# Altium PCB gps-tag-lora-addon.PcbDoc (part 1 of 3)
Units mm, origin at the board's own origin, x right, y up, seen from the top; angles counter-clockwise.
Board outline 60 x 35 mm, 2 copper layers (Top Layer, Bottom Layer); 76 components, 64 nets, 296 pads, 200 vias.
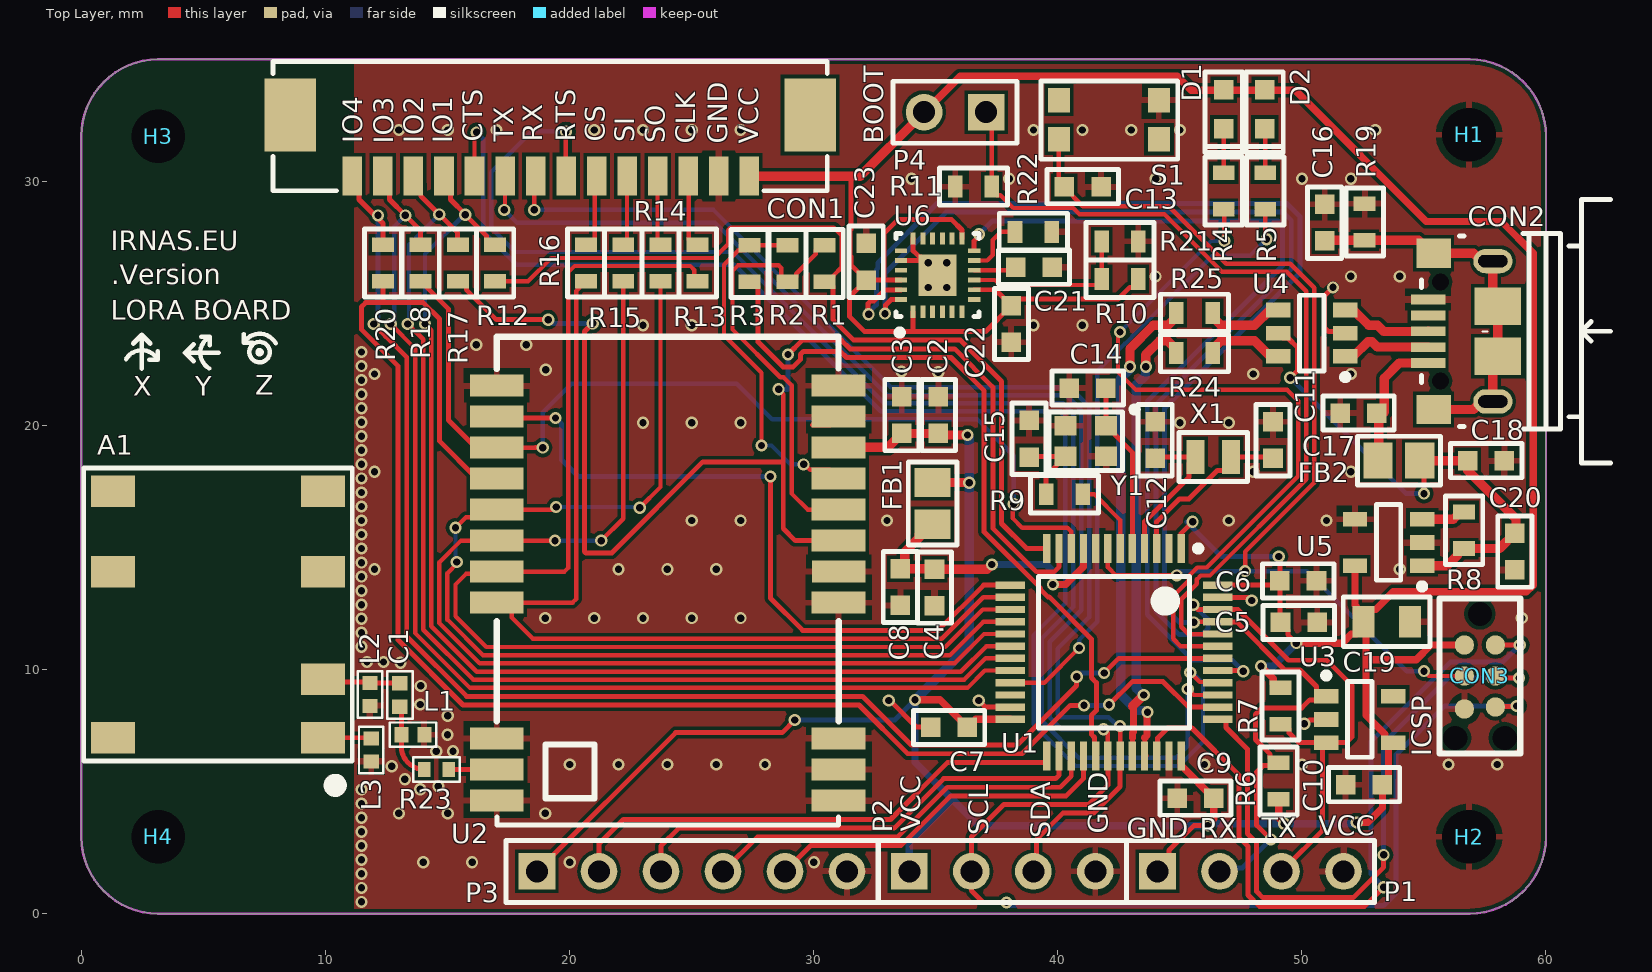
[diagram p0: Top Layer view]
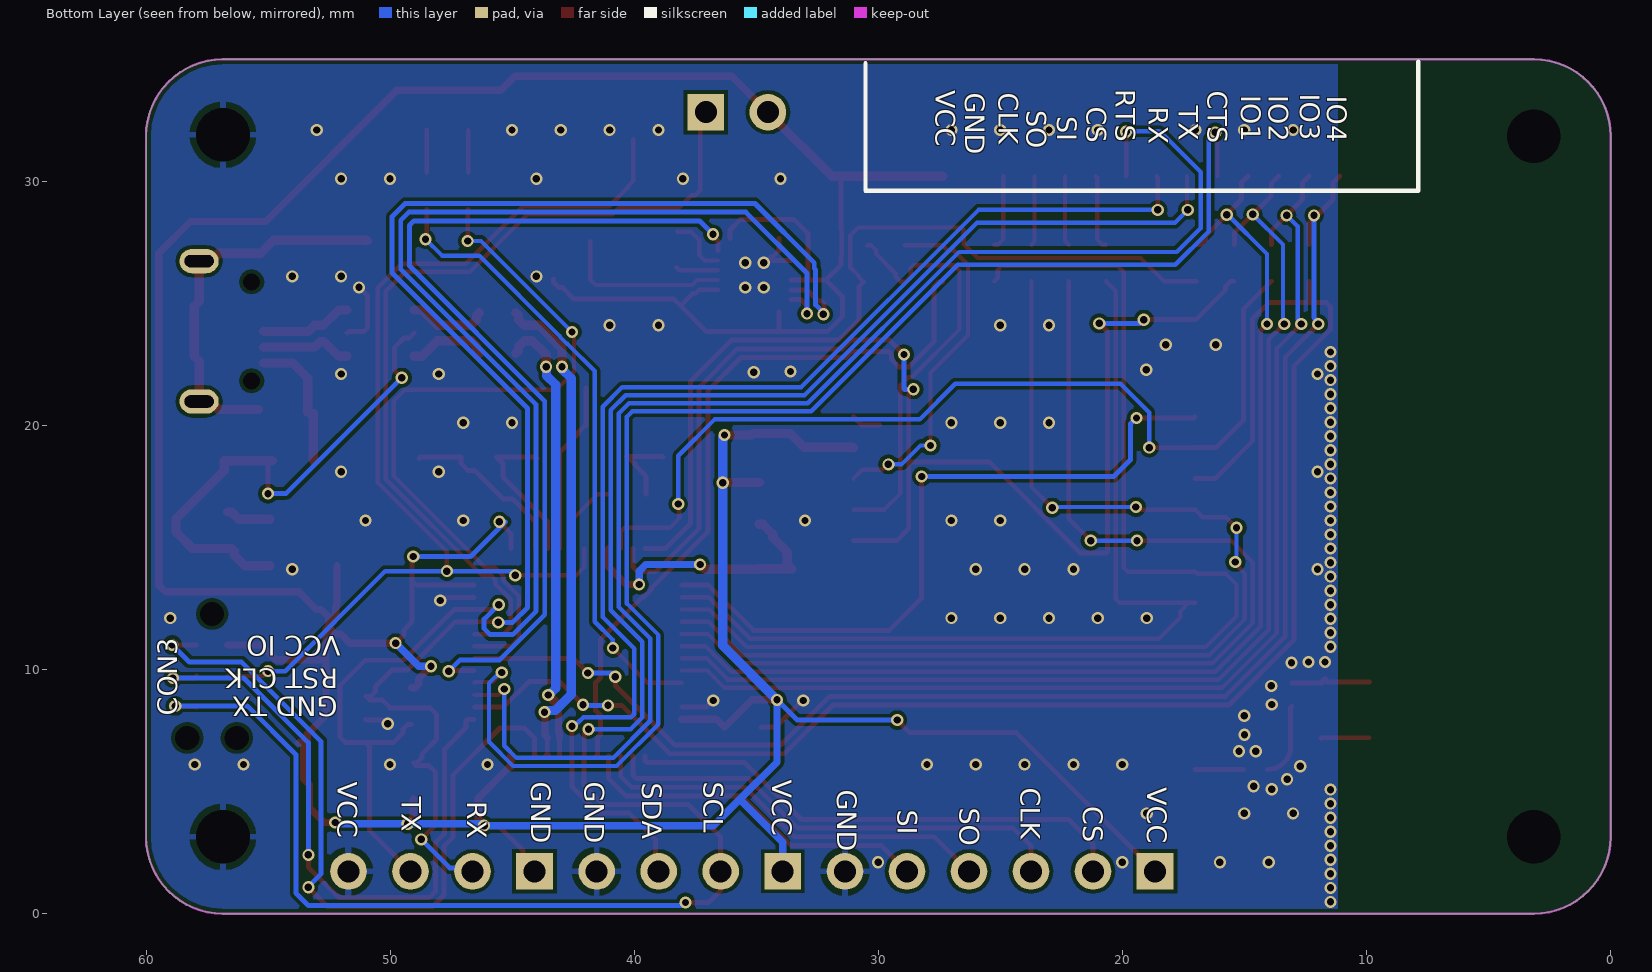
[diagram p1: Bottom Layer view, seen from below]

## Layer stack, top to bottom
Top Solder: solder mask 0.0102, Solder Resist, Dk 3.5
Top Layer: signal copper 0.0356
Dielectric 1: dielectric 0.32, FR-4, Dk 4.8
Bottom Layer: signal copper 0.0356
Bottom Solder: solder mask 0.0102, Solder Resist, Dk 3.5

## Board outline
0,3.116 0,31.866 cw(c3.15,31.841) 3.125,34.991 56.875,34.991 cw(c56.85,31.841) 60,31.866 60,3.116 cw(c56.85,3.141) 56.875,-0.009 3.125,-0.009 cw(c3.15,3.141)

## Design rules (kind name [scope] priority, off if disabled: settings)
Clearance [All] p1: gap=0.152 ignorepadtopadclearanceinfootprint=FALSE
ComponentClearance [All] p1: gap=0 collisioncheckmode=3 verticalgap=0 showdistances=FALSE
DiffPairsRouting [All] p1: maxlimit=0.254 minlimit=0.254 mostfreqgap=0.254 toplayer_minwidth=0.152 toplayer_maxwidth=0.381 toplayer_prefwidth=0.381 bottomlayer_minwidth=0.152 bottomlayer_maxwidth=0.381 bottomlayer_prefwidth=0.381 maxuncoupledlength=12.7
PolygonConnect [All] p1: thpad.connectstyle=Relief thpad.reliefconductorwidth=0.254 thpad.reliefentries=4 thpad.polygonreliefangle="90 Angle" thpad.airgapwidth=0.254 smdpad.connectstyle=Relief smdpad.reliefconductorwidth=0.254 smdpad.reliefentries=4 smdpad.polygonreliefangle="90 Angle" smdpad.airgapwidth=0.254 via.connectstyle=Direct via.reliefconductorwidth=0.254 via.reliefentries=4 via.polygonreliefangle="90 Angle" via.airgapwidth=0.254
RoutingVias [All] p1: holewidth=0.3 width=0.5 viastyle="Through Hole" minholewidth=0.3 minwidth=0.5 maxholewidth=0.711 maxwidth=1.27
SolderMaskExpansion [All] p1: expansion=0.102
Width [All] p1: maxlimit=0.381 minlimit=0.152 preferedwidth=0.178 minimp=50.000000 maximp=50.000000 favimp=50.000000
28 further rules are at their usual default settings.

## Classes and differential pairs
differential pair USB: +USB_P -USB_N
differential pair USB_CON: +USB_CON_P -USB_CON_N
differential pair USB_A: +USB_A_P -USB_A_N

## Components (designator, comment, footprint, x,y, rotation, side; value= is the part's Value field where it differs from the comment)
A1 "SR42I010-R" LORA_PCB_ANTENNA 5.6,12.25 r90 top
C1 "2.2uF" CAP0402 13.05,8.952 r90 top
C2 "100nF" CAP0603 35.113,20.417 r270 top
C3 "1uF" CAP0603 33.613,20.417 r270 top
C4 "1uF" CAP0603 34.95,13.35 r90 top
C5 "1uF" CAP0603 49.875,11.925 r180 top
C6 "100nF" CAP0603 49.85,13.63 r180 top
C7 "100nF" CAP0603 35.55,7.625 r0 top
C8 "100nF" CAP0603 33.55,13.375 r90 top
C9 "100nF" CAP0603 45.643,4.725 r0 top
C10 "100nF" CAP0603 52.55,5.275 r0 top
C11 "20pF" CAP0603 48.818,19.391 r270 top
C12 "20pF" CAP0603 43.992,19.39 r270 top
C13 "100nF" CAP0603 41.025,29.775 r180 top
C14 "20pF" CAP0603 41.225,21.525 r0 top
C15 "20pF" CAP0603 38.825,19.45 r270 top
C16 "330pF" CAP0603 50.937,28.3 r90 top
C17 "100nF" CAP0603 52.325,20.5 r0 top
C18 "100nF" CAP0603 57.55,18.55 r180 top
C19 "2.2uF" CAP0805 53.475,11.95 r180 top
C20 "1uF" CAP0603 58.725,14.825 r90 top
C21 "100nF" CAP0603 39.025,26.475 r180 top
C22 "10nF" CAP0603 38.1,24.15 r90 top
C23 "100nF" CAP0603 32.15,26.7 r270 top
CON1 "53261-1471" 53261-1471 29.856,32.708 r180 top
CON2 "microUSB" microUSB-CHINA 56.6,23.85 r90 top
CON3 "Tag connect" TC2030-IDC-NL 57.294,12.27 r270 top
D1 "LED RED" LED0603 46.8,32.95 r90 top
D2 "LED RED" LED0603 48.475,32.95 r90 top
FB1 "BLM21PG221SN1D" IND0805 34.875,16.8 r90 top
FB2 "BLM21PG221SN1D" IND0805 53.975,18.55 r0 top
H1 "2.2mm" HOLE 56.85,31.9 r0 top locked
H2 "2.2mm" HOLE 56.85,3.141 r0 top locked
H3 "2.2mm" HOLE 3.15,31.841 r0 top
H4 "2.2mm" HOLE 3.15,3.141 r0 top
L1 "33nH" IND0402 13.58,7.325 r180 top
L2 "33nH" IND0402 11.825,8.975 r90 top
L3 "4.3nH" IND0402 11.875,6.7 r90 top
P1 "Header 4" HDR1X4 44.085,1.725 r0 top
P2 "Header 4" HDR1X4 33.92,1.725 r0 top
P3 "Header 6" HDR1X6 18.665,1.725 r0 top
P4 "Header 2" HDR1X2 37.065,32.825 r180 top
R1 "0R" RES0603 30.45,26.625 r90 top
R2 "0R" RES0603 28.925,26.625 r270 top
R3 "0R" RES0603 27.375,26.625 r90 top
R4 "470R" RES0603 46.8,29.6 r270 top
R5 "470R" RES0603 48.5,29.6 r270 top
R6 "4k7" RES0603 49.05,5.425 r270 top
R7 "4k7" RES0603 49.125,8.5 r90 top
R8 "10k" RES0603 56.65,15.7 r270 top
R9 "220R" RES0603 40.275,17.175 r180 top
R10 "0R" RES0603 42.55,26 r180 top
R11 "10k" RES0603 36.55,29.775 r180 top
R12 "0R" RES0603 16.95,26.65 r270 top
R13 "0R" RES0603 25.25,26.65 r270 top
R14 "0R" RES0603 23.725,26.65 r270 top
R15 "0R" RES0603 22.2,26.65 r270 top
R16 "0R" RES0603 20.675,26.65 r270 top
R17 "0R" RES0603 15.425,26.65 r270 top
R18 "0R" RES0603 13.9,26.65 r270 top
R19 "1M" RES0603 52.575,28.325 r270 top
R20 "0R" RES0603 12.356,26.65 r270 top
R21 "0R" RES0603 42.55,27.538 r180 top
R22 "10k" RES0603 39,27.925 r0 top
R23 "0R" RES0402 14.55,5.9 r180 top
R24 "27R" RES0603 45.6,22.955 r180 top
R25 "27R" RES0603 45.6,24.606 r180 top
S1 "KMR221NGLFS" SW 42.175,32.35 r180 top
U1 "STM32L072CZ" TSQFP50P900X900X160-48N 42.304,10.702 r270 top
U2 "E22-900M22S" E22-900M22S 24.025,13.125 r0 top
U3 "24AA02E48T-I/OT" SOT95P280X145-5N 52.375,7.95 r0 top
U4 "USBLC6-2SC6" SOT95P280X145-6N 50.4,23.775 r180 top
U5 "TPS78326DDCT" SOT95P280X145-5N 53.55,15.2 r180 top
U6 "MPU-9250" QFN40P300X300X105_HS-25N 35.075,26.15 r90 top
X1 "32.768KHZ" CRY2X1.2 46.368,18.703 r0 top
Y1 "16MHz" CRY2.5X2 41.15,19.35 r180 top

## Footprints (in the part's own frame and the unit in brackets; to place one, negate y for a bottom-side part, rotate by r counter-clockwise, add the part's x,y. Pads: shape width x height; smd on the part's side, far side on the other; paste and mask are expansions set on the pad)
53261-1471 [mm]
  rect 0.8x1.6 smd: 1(2.5,2.5) 2(3.75,2.5) 3(5,2.5) 4(6.25,2.5) 5(7.5,2.5) 6(8.75,2.5) 7(10,2.5) 8(11.25,2.5) 9(12.5,2.5) 10(13.75,2.5) 11(15,2.5) 12(16.25,2.5) 13(17.5,2.5) 14(18.75,2.5)
  rect 2.1x3 smd: ""(0,0) ""(21.3,0)
  silkscreen extent -0.7,-2.2 22,3.1, body extent -0.67,-2.18 21.97,3.03, height 3.41
CAP0402 [mm] "Chip Capacitor, 2-Leads, Body 1.00x0.50mm, IPC Medium Density"
  rect 0.6x0.64 smd: 1(-0.48,0) 2(0.48,0)
  silkscreen extent -0.97,-0.53 0.97,0.53, body extent -0.55,-0.3 0.55,0.3, height 0.45
CAP0603 [mm]
  rect 0.8x0.8 smd: 1(-0.75,0) 2(0.75,0)
  silkscreen extent -1.46,-0.7 1.46,0.7, body extent -0.8,-0.4 0.8,0.4, height 0.9
CAP0805 [mm]
  rect 0.9x1.3 smd: 1(-0.95,0) 2(0.95,0)
  silkscreen extent -1.78,-1.02 1.78,1.02, body extent -1,-0.6 1,0.6, height 1.5
CRY2.5X2 [mm]
  rect 0.9x0.8 smd paste+0 mask+0: 1(-0.825,-0.625) 2(0.825,-0.625) 3(0.825,0.625) 4(-0.825,0.625)
  silkscreen extent -2.1,-1.4 1.5,1.2, body extent -1.25,-0.99 1.25,0.99, height 0.7
CRY2X1.2 [mm]
  rect 0.75x1.4 smd: 1(-0.725,0) 2(0.725,0)
  silkscreen extent -1.4,-1 1.4,1, body extent -1,-0.6 1,0.6, height 0.6
E22-900M22S [mm]
  rect 2.2x0.9 smd: 1(6.995,-8.5) 2(6.995,-7.23) 3(6.995,-5.96) 4(6.995,-0.39) 5(7.005,0.88) 6(6.995,2.15) 7(6.995,3.42) 8(6.995,4.69) 9(6.995,5.96) 10(6.995,7.23) 11(6.995,8.5) 12(-7.005,8.5) 13(-7.005,7.23) 14(-7.005,5.96) 15(-7.005,4.69) 16(-7.005,3.42) 17(-7.005,2.15) 18(-7.005,0.88) 19(-7.005,-0.39) 20(-7.005,-5.96) 21(-7.005,-7.23) 22(-7.005,-8.5)
  silkscreen extent -7,-9.5 7.01,10.5, body extent -7,-9.5 7,10.4, height 3.87
HDR1X2 [mm] "Connector; Header; 2 Position"
  rect 1.5x1.5 hole 0.9: 1(0,0)
  round 1.5 hole 0.9: 2(2.54,0)
  silkscreen extent -1.27,-1.27 3.81,1.27
HDR1X4 [mm] "Connector; Header; 4 Position"
  rect 1.5x1.5 hole 0.9: 1(0,0)
  round 1.5 hole 0.9: 2(2.54,0) 3(5.08,0) 4(7.62,0)
  silkscreen extent -1.27,-1.27 8.89,1.27
HDR1X6 [mm] "Connector; Header; 6 Position"
  rect 1.5x1.5 hole 0.9: 1(0,0)
  round 1.5 hole 0.9: 2(2.54,0) 3(5.08,0) 4(7.62,0) 5(10.16,0) 6(12.7,0)
  silkscreen extent -1.27,-1.27 13.97,1.27
HOLE [mm]
  round 0 hole 2.2 unplated mask+2.8: 1(0,0)
IND0402 [mm] "Chip Inductor, 2-Leads, Body 1.00x0.50mm, IPC Medium Density"
  rect 0.57x0.62 smd: 1(-0.47,0) 2(0.47,0)
  silkscreen extent -0.95,-0.5 0.95,0.5, body extent -0.53,-0.27 0.52,0.28, height 0.55
IND0805 [mm] "Chip Inductor, 2-Leads, Body 2.00x1.25mm, IPC Medium Density"
  rect 1.19x1.47 smd: 1(-0.855,0) 2(0.855,0)
  silkscreen extent -1.7,-1 1.7,1, body extent -1.1,-0.72 1.1,0.73, height 1.25
LED0603 [mm]
  rect 0.8x0.8 smd: 1(-0.8,0) 2(0.8,0)
  silkscreen extent -1.78,-0.76 1.52,0.76, body extent -0.85,-0.4 0.85,0.4, height 0.66
LORA_PCB_ANTENNA [mm]
  rect 1.3x1.8 smd: 1(-5.05,-4.3) 2(-2.65,-4.3) 3(1.75,-4.3) 4(5.05,-4.3) 5(5.05,4.3) 6(1.75,4.3) 7(-5.05,4.3)
  silkscreen extent -7.22,-5.5 6,5.5, body extent -6,-5.5 6,5.5, height 1.7
microUSB-CHINA [mm]
  rect 0.4x1.4 smd mask+0.05: 1(-1.3,1.425) 2(-0.65,1.425) 3(0,1.425) 4(0.65,1.425) 5(1.3,1.425)
  rect 1.2x1.4 smd: 6(-3.2,1.2) 7(3.2,1.2)
  oval 1x1.6 hole 0.5 slot 1.2 at 90 deg: 8(-2.875,-1.225) 9(2.875,-1.225)
  rect 1.55x1.9 smd paste-0.254: 10(-1.025,-1.425) 11(1.025,-1.425)
  rect 0x0 hole 0.7 unplated: ""(-2.028,0.925) ""(2.022,0.925)
  silkscreen extent -5.4,-6.05 5.4,1.7, body extent -4.04,-3.83 4.04,1.73, height 2.77
QFN40P300X300X105_HS-25N [mm] "QFN, 24-Leads, Body 3.00x3.00mm, Pitch 0.40mm, Thermal Pad 1.70x1.54mm, IPC Medium Density"
  rect 0.5x0.2 smd: 1(-1.5,1) 2(-1.5,0.6) 3(-1.5,0.2) 4(-1.5,-0.2) 5(-1.5,-0.6) 6(-1.5,-1) 13(1.5,-1) 14(1.5,-0.6) 15(1.5,-0.2) 16(1.5,0.2) 17(1.5,0.6) 18(1.5,1)
  rect 0.2x0.5 smd: 7(-1,-1.5) 8(-0.6,-1.5) 9(-0.2,-1.5) 10(0.2,-1.5) 11(0.6,-1.5) 12(1,-1.5) 19(1,1.5) 20(0.6,1.5) 21(0.2,1.5) 22(-0.2,1.5) 23(-0.6,1.5) 24(-1,1.5)
  rect 1.7x1.54 smd paste-0.2: 25(0,0)
  silkscreen extent -2.47,-1.7 1.7,1.7, body extent -1.55,-1.55 1.55,1.55, height 1.05
RES0402 [mm] "Chip Resistor, 2-Leads, Body 1.00x0.50mm, IPC Medium Density"
  rect 0.5x0.6 smd: 1(-0.5,0) 2(0.5,0)
  silkscreen extent -0.95,-0.5 0.95,0.5, body extent -0.5,-0.25 0.5,0.25, height 0.35
RES0603 [mm]
  rect 0.6x0.9 smd: 1(-0.75,0) 2(0.75,0)
  silkscreen extent -1.4,-0.76 1.4,0.76, body extent -0.8,-0.42 0.8,0.42, height 0.8
SOT95P280X145-5N [mm] "SOT23, 5-Leads, Body 2.90x2.80mm, Pitch 0.95mm, IPC Medium Density"
  rect 1x0.6 smd: 1(-1.375,0.95) 2(-1.375,0) 3(-1.375,-0.95) 4(1.375,-0.95) 5(1.375,0.95)
  silkscreen extent -1.5,-1.55 0.5,1.92, body extent -1.5,-1.53 1.5,1.53, height 1.45
SOT95P280X145-6N [mm] "SOT23, 6-Leads, Body 2.90x2.80mm, Pitch 0.95mm, IPC Medium Density"
  rect 1x0.6 smd: 1(-1.375,0.95) 2(-1.375,0) 3(-1.375,-0.95) 4(1.375,-0.95) 5(1.375,0) 6(1.375,0.95)
  silkscreen extent -1.5,-1.55 0.5,1.92, body extent -1.5,-1.52 1.5,1.53, height 1.45
SW [mm]
  rect 0.9x1 smd: 1(-1.968,0.63) 2(-1.968,-0.97) 3(2.132,0.63) 4(2.132,-0.97)
  silkscreen extent -2.74,-1.75 2.86,1.45, body extent -2.22,-1.66 2.38,1.34, height 2.1
TC2030-IDC-NL [mm] "Tag-Connect 6-Pin with No Legs (PN# TC2030-IDC-NL)"
  round 0.9 hole 0.995 unplated: 0(0,0) 0(5.08,1.016) 0(5.08,-1.016)
  round 0.79 smd paste-0.39: 1(1.27,-0.635) 2(1.27,0.635) 3(2.54,-0.635) 4(2.54,0.635) 5(3.89,-0.635) 6(3.81,0.635)
  silkscreen extent -0.64,-1.65 5.71,1.65
TSQFP50P900X900X160-48N [mm] "TSQFP, 48-Leads, Body 7.00x7.00mm, Pitch 0.50mm, IPC Medium Density"
  rect 1.2x0.3 smd: 1(-4.25,2.75) 2(-4.25,2.25) 3(-4.25,1.75) 4(-4.25,1.25) 5(-4.25,0.75) 6(-4.25,0.25) 7(-4.25,-0.25) 8(-4.25,-0.75) 9(-4.25,-1.25) 10(-4.25,-1.75) 11(-4.25,-2.25) 12(-4.25,-2.75) 25(4.25,-2.75) 26(4.25,-2.25) 27(4.25,-1.75) 28(4.25,-1.25) 29(4.25,-0.75) 30(4.25,-0.25) 31(4.25,0.25) 32(4.25,0.75) 33(4.25,1.25) 34(4.25,1.75) 35(4.25,2.25) 36(4.25,2.75)
  rect 0.3x1.2 smd: 13(-2.75,-4.25) 14(-2.25,-4.25) 15(-1.75,-4.25) 16(-1.25,-4.25) 17(-0.75,-4.25) 18(-0.25,-4.25) 19(0.25,-4.25) 20(0.75,-4.25) 21(1.25,-4.25) 22(1.75,-4.25) 23(2.25,-4.25) 24(2.75,-4.25) 37(2.75,4.25) 38(2.25,4.25) 39(1.75,4.25) 40(1.25,4.25) 41(0.75,4.25) 42(0.25,4.25) 43(-0.25,4.25) 44(-0.75,4.25) 45(-1.25,4.25) 46(-1.75,4.25) 47(-2.25,4.25) 48(-2.75,4.25)
  silkscreen extent -4.37,-3.1 3.1,3.57, body extent -4.5,-4.5 4.5,4.5, height 1.6

## Part data
A1: "Antenna SMD -4dBi Gain 870MHz/928MHz Automotive 7-Pin SMD T/R", Manufacturer=Antenova, Supplier Part Number 1=237-SR42I010-R, Manufacturer Part Number=SR42I010-R, Pricing 1="1 = 2.36000, 10 = 1.90000, 50 = 1.90000, 100 = 1.52000, 1000 = 1.07000, 10000 = 0.95900 (USD)", Stock 1=3154, Supplier 1=Mouser
C1: library part 2.2iF/0402, "Multilayer Ceramic Capacitors MLCC - SMD/SMT 0402 2.2pF 50Volts C0G +/-0.05pF", Capacitance=2.2pF, Case/Package=0402, Case Code (Metric)=1005, Dielectric=C0G, Manufacturer=Murata, Manufacturer Part Number=GJM1555C1H2R2WB01D, Max Operating Temperature=125°C, Min Operating Temperature=-55°C, Package Quantity=10000, Supplier Part Number 1=2781431, Voltage Rating=50V, Case Code (Imperial)=0402, Depth=0.5mm, Height=0.5mm, Lead Free="Lead Free", Length=0.039inch, Mount="Surface Mount", Packaging="Tape and Reel", Pricing 1="10 = 0.19700, 100 = 0.09710, 500 = 0.05500, 2500 = 0.04500 (GBP)", Radiation Hardening=No, RoHS=Yes, Stock 1=14764, Supplier 1=Farnell, Termination=SMD/SMT, Thickness=0.022inch, Voltage Rating (DC)=50V, Width=0.02inch
C2 C6 C7 C8 C9 C10 C13 C17 C18 C21 C23: "MURATA - GRM188R71C104KA01J - CAP, MLCC, X7R, 0.1UF, 16V, 0603", Capacitance=0.1, Capacitance Tolerance="± 10%", Ceramic Capacitor Case="0603 [1608 Metric]", Dielectric Characteristic=X7, Manufacturer=MURATA, Manufacturer Part Number=GRM188R71C104KA01J, Operating Temperature Max=125, Operating Temperature Min=-55, Supplier Part Number 1=2688519, Voltage Rating=16, Automotive Qualification Standard=-, ComponentLink1Description=http://www.farnell.com/datasheets/2189124.pdf, ComponentLink1URL=http://www.farnell.com/datasheets/2189124.pdf, MSL="MSL 1 - Unlimited", Packaging="Cut Tape", Pricing 1="10=0.0145, 100=0.0126, 500=0.0081, 2500=0.0059, 5000=0.0052, 10000=0.0046, 50000=0.0036, 100000=0.0035 (GBP)", Product Range="GRM Series", RoHS=YES, Stock 1=18297, Supplier 1=Farnell, SVHC="No SVHC (20-Jun-2016"
C3 C4 C5 C20: "MURATA - GRM188R61H105KAALD - CAP, MLCC, X5R, 1UF, 50V, 0603", Capacitance=1, Capacitance Tolerance="± 10%", Capacitor Terminals="SMD<!--FANDB--><div class=\"features-and-benefits-container\"><div class=\"features-and-benefits-description\"><span class=\"features-benefits-value\">The Murata GRM series capacitors are Multilayer Ceramic Chip Capacitors (MLCC) used for general purpose applications. These MLCC capacitors are classified into temperature compensating and high dielectric constant types depending on the change in electrostatic capacitance due to change in temperature. The temperature compensating capacitors feature a small rate of change in electrostatic capacitance as the temperature changes and are used for applications such as filters and high frequency circuit matching. The high dielectric constant capacitors use materials with a high dielectric constant and feature a large electrostatic capacitance. Typical applications are power supply decoupling and smoothing circuits.</span></div><div class=\"features-and-benefits-list\"><ul class=\"features-and-benefits-list-list\"><li class=\"features-and-benefits-list-item\">Large capacity and small size in a multilayer structure</li><li class=\"features-and-benefits-list-item\">Capacitance value ranging from 0.1pF to 220?F</li><li class=\"features-and-benefits-list-item\">Tin plated external electrodes, excellent solderability</li><li class=\"features-and-benefits-list-item\">Provides good high frequency characteristics</li><li class=\"features-and-benefits-list-item\">Excellent pulse response</li><li class=\"features-and-benefits-list-item\">High reliability</li><li class=\"features-and-benefits-list-item\">Capacitor size varies from 0.4×0.2mm to 5.7×5.0mm</li><li class=\"features-and-benefits-list-item\">Rated voltage of 2.5VDC to 3.15", Ceramic Capacitor Case="0603 [1608 Metric]", Dielectric Characteristic=X5, Manufacturer=MURATA, Manufacturer Part Number=GRM188R61H105KAALD, Operating Temperature Max=85, Operating Temperature Min=-55, Supplier Part Number 1=1845736, Voltage Rating=50, Automotive Qualification Standard=-, Capacitance Tolerance ±="± 10%", ComponentLink1Description=http://www.farnell.com/datasheets/2048611.pdf, ComponentLink1URL=http://www.farnell.com/datasheets/2048611.pdf, MSL=-, Packaging="Cut Tape", Pricing 1="10=0.093, 100=0.062, 500=0.0507, 1000=0.0465, 2000=0.0429, 4000=0.0399, 20000=0.0372, 40000=0.0365 (GBP)", Product Range="GRM Series", RoHS=YES, Stock 1=62682, Supplier 1=Farnell, SVHC="No SVHC (17-Dec-2015)"
C11 C12 C14 C15: "MURATA - GRM1885C1H200JA01D - CAPACITOR, MLCC, C0G, 20PF, 50V, 0603", Capacitance=20, Capacitance Tolerance="± 5%", Ceramic Capacitor Case="0603 [1608 Metric]", Dielectric Characteristic="C0G / NP0", Manufacturer=MURATA, Manufacturer Part Number=GRM1885C1H200JA01D, Operating Temperature Max=125, Operating Temperature Min=-55, Supplier Part Number 1=2456108, Voltage Rating=50, Automotive Qualification Standard=-, ComponentLink1Description=http://www.farnell.com/datasheets/2048077.pdf, ComponentLink1URL=http://www.farnell.com/datasheets/2048077.pdf, MSL="MSL 1 - Unlimited", Packaging="Cut Tape", Pricing 1="10=0.0245, 100=0.0159, 500=0.0123, 1000=0.0095, 2000=0.0093, 4000=0.0073, 20000=0.0062, 40000=0.0057 (GBP)", Product Range="GRM Series", RoHS=YES, Stock 1=5812, Supplier 1=Farnell, SVHC="No SVHC (17-Dec-2015"
C16: "Cap Ceramic 330pF 50V C0G 5% SMD 0603 125C Paper T/R", Case/Package=0603, Case Code (Metric)=1608, Dielectric=C0G, Manufacturer="Walsin Technologies", Manufacturer Part Number=0603N331J500CT, Max Operating Temperature=125°C, Min Operating Temperature=-55°C, Supplier Part Number 1=2496902, Tolerance=5%, Voltage Rating=50V, Capacitance=330pF, Case Code (Imperial)=0603, Depth=0.8mm, Length=1.6mm, Packaging="Tape and Reel", Pricing 1="10=0.066, 100=0.0446, 500=0.0195, 1000=0.0138 (GBP)", Radiation Hardening=No, REACH SVHC=Unknown, Stock 1=9688, Supplier 1=Farnell, Voltage Rating (DC)=50V
C19: library part 2.2uF/0805, "Multilayer Ceramic Capacitors MLCC - SMD/SMT 2.2uF 25V X7R 10%", Case/Package=0805, Case Code (Metric)=2012, Dielectric=X7R, Manufacturer=Yageo, Manufacturer Part Number=CC0805KKX7R8BB225, Max Operating Temperature=125°C, Min Operating Temperature=-55°C, Supplier Part Number 1=1458904, Tolerance=10%, Voltage Rating=25V, Capacitance=2.2uF, Case Code (Imperial)=0805, ComponentLink1Description=https://datasheet.ciiva.com/7009/775840-7009706.pdf, ComponentLink1URL=https://datasheet.ciiva.com/7009/775840-7009706.pdf, Composition=Ceramic, Depth=1.25mm, Halogen Free="Halogen Free", Height=0.3mm, Lead Free="Lead Free", Length=2mm, Mount="Surface Mount", Number of Pins=2, Packaging="Tape and Reel", Pricing 1="5=0.269, 50=0.163, 250=0.109, 500=0.0929, 1500=0.0722, 3000=0.0594, 15000=0.05 (GBP)", Radiation Hardening=No, REACH SVHC=Unknown, Stock 1=0, Supplier 1=Farnell, Termination=SMD/SMT, Thickness=0.057inch, Voltage Rating (DC)=25V, Width=1.25mm
C22: "KEMET - C0603X103K5RECAUTO - CAP, MLCC, AEC-Q200, X7R, 0.01UF, 50V", Manufacturer="TDK EPCOS", Manufacturer Part Number=C0603X103K5RECAUTO, Supplier Part Number 1=2760492, ComponentLink1Description=http://www.farnell.com/datasheets/2290180.pdf, ComponentLink1URL=http://www.farnell.com/datasheets/2290180.pdf, Pricing 1="10=0.133, 100=0.0731, 500=0.055, 1000=0.0465, 2000=0.0408, 4000=0.0336, 20000=0.0295 (GBP)", Stock 1=307350, Supplier 1=Farnell
CON1: "1.25mm (.049\") Pitch PicoBlade Header, Surface Mount, Right Angle, Lead-free, 14 Circuits", Color=Beige, Contact Resistance=20mR, Current Rating=1A, Insulation Resistance=100MR, Manufacturer=Molex, Max Operating Temperature=85°C, Min Operating Temperature=-40°C, Package Quantity=1000, Supplier Part Number 1=1125364, Voltage Rating=125V, Body Plating=Tin, ComponentLink1Description=http://www.onlinecomponents.com/productFiles/mf-MOL/318250532611471_pcb_headers.pdf?src-supplier=Onlinecomponents.com, ComponentLink1URL=http://www.onlinecomponents.com/productFiles/mf-MOL/318250532611471_pcb_headers.pdf?src-supplier=Onlinecomponents.com, ComponentLink2Description=http://uk.rs-online.com/webdocs/13c4/0900766b813c44d0.pdf?src-supplier=RSComponents, ComponentLink2URL=http://uk.rs-online.com/webdocs/13c4/0900766b813c44d0.pdf?src-supplier=RSComponents, ComponentLink3Description=https://www.distrelec.biz/Web/Downloads/74/_e/gh116861-116874_e.pdf?mime=application%2Fpdf&src-supplier=Distrelec, ComponentLink3URL=https://www.distrelec.biz/Web/Downloads/74/_e/gh116861-116874_e.pdf?mime=application%2Fpdf&src-supplier=Distrelec, ComponentLink4Description=http://www.farnell.com/datasheets/1767586.pdf?src-supplier=Element14, ComponentLink4URL=http://www.farnell.com/datasheets/1767586.pdf?src-supplier=Element14, ComponentLink5Description=http://www.mouser.com/ds/2/276/0532611471_PCB_HEADERS-256969.pdf?src-supplier=Mouser, ComponentLink5URL=http://www.mouser.com/ds/2/276/0532611471_PCB_HEADERS-256969.pdf?src-supplier=Mouser, ComponentLink6Description=http://datasheet.octopart.com/532611471-Molex-datasheet-8343080.pdf?src-supplier=TME, ComponentLink6URL=http://datasheet.octopart.com/532611471-Molex-datasheet-8343080.pdf?src-supplier=TME, ComponentLink7Description=http://datasheet.octopart.com/53261-1471-Molex-datasheet-13786036.pdf?src-supplier=Molex, ComponentLink7URL=http://datasheet.octopart.com/53261-1471-Molex-datasheet-13786036.pdf?src-supplier=Molex, ComponentLink8Description=http://sigma.octopart.com/16413766/technical_drawing/Molex-53261-1471.pdf?src-supplier=Molex, ComponentLink8URL=http://sigma.octopart.com/16413766/technical_drawing/Molex-53261-1471.pdf?src-supplier=Molex, ComponentLink9Description=http://datasheet.octopart.com/53261-1471-Molex-datasheet-120153911.pdf?src-supplier=Allied+Electronics, ComponentLink9URL=http://datasheet.octopart.com/53261-1471-Molex-datasheet-120153911.pdf?src-supplier=Allied+Electronics, ComponentLink10Description=http://datasheet.octopart.com/0532611471-Molex-datasheet-11835648.pdf?src-supplier=Newark, ComponentLink10URL=http://datasheet.octopart.com/0532611471-Molex-datasheet-11835648.pdf?src-supplier=Newark, ComponentLink11Description=http://datasheet.octopart.com/53261-1471-Molex-datasheet-82508140.pdf?src-supplier=Farnell, ComponentLink11URL=http://datasheet.octopart.com/53261-1471-Molex-datasheet-82508140.pdf?src-supplier=Farnell, ComponentLink12Description=http://datasheet.octopart.com/53261-1471-Molex-datasheet-130544.pdf?src-supplier=Digi-Key, ComponentLink12URL=http://datasheet.octopart.com/53261-1471-Molex-datasheet-130544.pdf?src-supplier=Digi-Key, ComponentLink13Description=http://datasheet.octopart.com/532611471-Molex-datasheet-509611.pdf?src-supplier=Farnell, ComponentLink13URL=http://datasheet.octopart.com/532611471-Molex-datasheet-509611.pdf?src-supplier=Farnell, ComponentLink14Description=http://datasheet.octopart.com/53261-1471-Molex-datasheet-11023919.pdf?src-supplier=Farnell, ComponentLink14URL=http://datasheet.octopart.com/53261-1471-Molex-datasheet-11023919.pdf?src-supplier=Farnell, ComponentLink15Description=http://datasheet.octopart.com/53261-1471-Molex-datasheet-100429.pdf?src-supplier=Element14, ComponentLink15URL=http://datasheet.octopart.com/53261-1471-Molex-datasheet-100429.pdf?src-supplier=Element14, ComponentLink16Description=http://datasheet.octopart.com/53261-1471-Molex-datasheet-8522546.pdf?src-supplier=Element14, ComponentLink16URL=http://datasheet.octopart.com/53261-1471-Molex-datasheet-8522546.pdf?src-supplier=Element14, ComponentLink17Description=http://datasheet.octopart.com/53261-1471-Molex-datasheet-23710581.pdf?src-supplier=Electro+Sonic, ComponentLink17URL=http://datasheet.octopart.com/53261-1471-Molex-datasheet-23710581.pdf?src-supplier=Electro+Sonic, ComponentLink18Description=http://datasheet.octopart.com/53261-1471-Molex-datasheet-34442330.pdf?src-supplier=Allied+Electronics, ComponentLink18URL=http://datasheet.octopart.com/53261-1471-Molex-datasheet-34442330.pdf?src-supplier=Allied+Electronics, ComponentLink19Description=http://datasheet.octopart.com/53261-1471-Molex-datasheet-48284398.pdf?src-supplier=Newark, ComponentLink19URL=http://datasheet.octopart.com/53261-1471-Molex-datasheet-48284398.pdf?src-supplier=Newark, Contact Material=Brass,Bronze,Tin, Contact Plating=Tin, Gender=Male, Glow Wire Compliant=Non-compliant, Height=3.4mm, Housing Material=Thermoplastic, Lead Free="Lead Free", Lead Pitch=1.25mm, Manufacturer Part Number=53261-1471, Mount="Surface Mount", Number of Circuits=14, Number of Contacts=14, Number of Positions=14, Number of Rows=1, Orientation="Right Angle", Packaging="Tape and Reel", Pitch=1.25mm, Pricing 1="10 = 1.74000, 50 = 1.63000, 100 = 1.51000, 250 = 1.37000, 500 = 1.09000, 1500 = 0.96100 (GBP)", Radiation Hardening=No, REACH SVHC=Unknown, Stock 1=2619, Supplier 1=Farnell, Termination=SMD/SMT, Voltage Rating (AC)=125V, Voltage Rating (DC)=125V, Working Voltage=125V
CON2: library part "Micro USB CHINA 1"
CON3: library part "tag connecot 6 pin"
D1 D2: "BROADCOM LIMITED - HSMS-C190 - LED, RED, 10MCD, 626NM", Forward Current If=20, Forward Voltage=2.1, LED Colour=Red, Manufacturer="BROADCOM LIMITED", Manufacturer Part Number=HSMS-C190, Supplier Part Number 1=2497356, Automotive Qualification Standard=-, Bulb Size=-, ComponentLink1Description=http://www.farnell.com/datasheets/313031.pdf, ComponentLink1URL=http://www.farnell.com/datasheets/313031.pdf, ComponentLink2Description=http://www.farnell.com/datasheets/1681524.pdf, ComponentLink2URL=http://www.farnell.com/datasheets/1681524.pdf, ComponentLink3Description=http://www.farnell.com/datasheets/2165483.pdf, ComponentLink3URL=http://www.farnell.com/datasheets/2165483.pdf, LED Mounting=SMD, Lens Shape=Rectangular, Luminous Intensity=10, MSL=-, Packaging="Cut Tape", Pricing 1="1=0.361, 10=0.256, 50=0.235, 100=0.106, 200=0.101 (GBP)", Product Range=-, RoHS=YES, Stock 1=7534, Supplier 1=Farnell, SVHC="No SVHC (17-Dec-2015)<!--FANDB--><div class=\"features-and-benefits-container\"><div class=\"features-and-benefits-description\"><span class=\"features-benefits-value\">The HSMS-C190 is a HER SMD Chip LED with untinted/diffused lens, made of GaP. It is designed in an industry standard package 1.6 x 0.8mm footprint with 0.8mm profile. It is compatible with IR reflow solder processes. The small size and wide viewing angle make this LED prime choices for backlighting applications and front panel illumination especially where space is a premium.</span></div><div class=\"features-and-benefits-list\"><ul class=\"features-and-benefits-list-list\"><li class=\"features-and-benefits-list-item\">Small size</li><li class=\"features-and-benefits-list-item\">Industry standard footprint</li><li class=\"features-and-benefits-list-item\">Compatible with IR solder</li><li class=\"features-and-benefits-list-item\">Diffused optics</li><li class=\"features-and-benefits-list-item\">-40 to 85", Viewing Angle=170°, Wavelength Typ=626
FB1 FB2: "FERRITE CHIP 220 OHM 0805", Case/Package=0805, Case Code (Metric)=2012, Current=2A, DC Resistance (DCR)=45mR, Frequency=100MHz, Manufacturer=Murata, Max Operating Temperature=125°C, Min Operating Temperature=-55°C, Package Quantity=1, Supplier Part Number 1=1515661, Tolerance=25%, Case Code (Imperial)=0805, ComponentLink1Description=https://www.murata.com/en-us/products/productdata/8796738977822/ENFA0005.pdf, ComponentLink1URL=https://www.murata.com/en-us/products/productdata/8796738977822/ENFA0005.pdf, ComponentLink2Description=http://uk.rs-online.com/webdocs/1388/0900766b813885e8.pdf, ComponentLink2URL=http://uk.rs-online.com/webdocs/1388/0900766b813885e8.pdf, ComponentLink3Description=https://www.distrelec.biz/Web/Downloads/ta/_e/anBLM21P_Data_E.pdf?mime=application%2Fpdf, ComponentLink3URL=https://www.distrelec.biz/Web/Downloads/ta/_e/anBLM21P_Data_E.pdf?mime=application%2Fpdf, ComponentLink4Description=http://search.murata.co.jp/Ceramy/image/img/PDF/ENG/L0110S0100BLM21P.pdf, ComponentLink4URL=http://search.murata.co.jp/Ceramy/image/img/PDF/ENG/L0110S0100BLM21P.pdf, ComponentLink5Description=http://www.farnell.com/datasheets/1756152.pdf, ComponentLink5URL=http://www.farnell.com/datasheets/1756152.pdf, ComponentLink6Description=http://www.jameco.com/Jameco/Products/ProdDS/1845321.pdf, ComponentLink6URL=http://www.jameco.com/Jameco/Products/ProdDS/1845321.pdf, ComponentLink7Description=http://www.produktinfo.conrad.com/datenblaetter/425000-449999/442529-da-01-en-CHIP_DROSSEL_0805_220R_2000MA_2_0X1_25MM.pdf, ComponentLink7URL=http://www.produktinfo.conrad.com/datenblaetter/425000-449999/442529-da-01-en-CHIP_DROSSEL_0805_220R_2000MA_2_0X1_25MM.pdf, Contact Plating=Matte,Tin, Core Material=Ferrite, Current Rating=2A, DC Current=2A, Depth=1.25mm, Height=0.85mm, Impedance=220R, Lead Free="Lead Free", Length=2mm, Manufacturer Part Number=BLM21PG221SN1D, Material=Ferrite,Steel, Max Current Rating=2A, Max DC Current=2A, Military Standard=Not, Number of Circuits=1, Number of Lines=1, Number of Pins=2, Packaging="Tape and Reel", Pricing 1="10=0.0521, 100=0.0337, 500=0.0251, 1000=0.0207, 2000=0.0196, 4000=0.0156, 20000=0.0145 (GBP)", Radiation Hardening=No, REACH SVHC="No SVHC", Shielding=Unshielded, Stock 1=8102, Supplier 1=Farnell, Termination=SMD/SMT, Test Frequency=100MHz, Width=1.25mm
H1 H2 H3 H4: library part Hole
L1 L2: library part 33nH/0402, "FIXED IND 33NH 200MA 580 MOHM", Case/Package=0402, Case Code (Metric)=1005, Current Rating=200mA, DC Resistance (DCR)=580mR, Inductance=33nh, Manufacturer=Murata, Manufacturer Part Number=LQG15HS33NJ02D, Max Operating Temperature=125°C, Min Operating Temperature=-55°C, Package Quantity=10000, Self Resonant Frequency=1.6GHz, Supplier Part Number 1=490-2629-1-ND, Test Frequency=100MHz, Tolerance=5%, Case Code (Imperial)=0402, ComponentLink1Description=https://datasheet.ciiva.com/11799/0900766b8090d685-11799024.pdf, ComponentLink1URL=https://datasheet.ciiva.com/11799/0900766b8090d685-11799024.pdf, ComponentLink2Description=https://datasheet.ciiva.com/1038/l0075s0083lqg15hs-1038140.pdf, ComponentLink2URL=https://datasheet.ciiva.com/1038/l0075s0083lqg15hs-1038140.pdf, ComponentLink3Description=https://datasheet.ciiva.com/1038/l0075s0083lqg15hs-1038141.pdf, ComponentLink3URL=https://datasheet.ciiva.com/1038/l0075s0083lqg15hs-1038141.pdf, ComponentLink4Description=https://datasheet.ciiva.com/16207/l0075s0083lqg15hs-16207871.pdf, ComponentLink4URL=https://datasheet.ciiva.com/16207/l0075s0083lqg15hs-16207871.pdf, ComponentLink5Description=https://datasheet.ciiva.com/1038/l0075s0083lqg15hs-1038139.pdf, ComponentLink5URL=https://datasheet.ciiva.com/1038/l0075s0083lqg15hs-1038139.pdf, ComponentLink6Description=https://datasheet.ciiva.com/17279/l0075s0083lqg15hs-17279253.pdf, ComponentLink6URL=https://datasheet.ciiva.com/17279/l0075s0083lqg15hs-17279253.pdf, ComponentLink7Description=https://datasheet.ciiva.com/4977/o05e-4977560.pdf, ComponentLink7URL=https://datasheet.ciiva.com/4977/o05e-4977560.pdf, ComponentLink8Description=https://datasheet.ciiva.com/8510/l0075s0083lqg15hs-8510857.pdf, ComponentLink8URL=https://datasheet.ciiva.com/8510/l0075s0083lqg15hs-8510857.pdf, Core Material=Air, DC Current=200mA, Depth=0.55mm, Height=0.5mm, Height - Seated (Max)=0.022inch, Lead Free="Lead Free", Length=1mm, Max DC Current=200mA, Military Standard=Not, Mount="Surface Mount", Packaging="Tape and Reel", Pricing 1="1=0.1, 10=0.061, 100=0.0404, 500=0.0337, 1000=0.0283, 2500=0.0242 (USD)", Q Factor=8, Radiation Hardening=No, Shielding=Unshielded, Stock 1=168013, Supplier 1=Digi-Key, Termination=SMD/SMT, Width=0.5mm
L3: library part 4.3nH/0402, "Inductor RF Chip Multi-Layer 4.3nH 0.3nH 100MHz 8Q-Factor Air 300mA 210mOhm DCR 0402 Paper T/R", Case/Package=0402, Case Code (Metric)=1005, Current=300mA, DC Resistance (DCR)=210mR, Inductance=4.3nh, Manufacturer=Murata, Manufacturer Part Number=LQG15HN4N3S02D, Max Operating Temperature=125°C, Min Operating Temperature=-55°C, Package Quantity=10000, Self Resonant Frequency=6GHz, Supplier Part Number 1=490-6563-1-ND, Test Frequency=100MHz, Case Code (Imperial)=0402, ComponentLink1Description=http://uk.rs-online.com/webdocs/0f10/0900766b80f10808.pdf?src-supplier=RSComponents, ComponentLink1URL=http://uk.rs-online.com/webdocs/0f10/0900766b80f10808.pdf?src-supplier=RSComponents, ComponentLink2Description=http://search.murata.co.jp/Ceramy/image/img/PDF/ENG/L0075S0083LQG15HN.pdf?src-supplier=Avnet, ComponentLink2URL=http://search.murata.co.jp/Ceramy/image/img/PDF/ENG/L0075S0083LQG15HN.pdf?src-supplier=Avnet, ComponentLink3Description=http://www.farnell.com/datasheets/66026.pdf?src-supplier=Element14, ComponentLink3URL=http://www.farnell.com/datasheets/66026.pdf?src-supplier=Element14, ComponentLink4Description=https://www.verical.com/server-webapp/html/getDatasheet?partID=31252&src-supplier=Verical, ComponentLink4URL=https://www.verical.com/server-webapp/html/getDatasheet?partID=31252&src-supplier=Verical, ComponentLink5Description=http://search.murata.co.jp/Ceramy/image/img/PDF/ENG/L0075S0083LQG15HN.pdf?src-supplier=Avnet+Europe, ComponentLink5URL=http://search.murata.co.jp/Ceramy/image/img/PDF/ENG/L0075S0083LQG15HN.pdf?src-supplier=Avnet+Europe, ComponentLink6Description=https://search.murata.co.jp/Ceramy/image/img/P02/partnumberingAT_LQ3E.pdf?src-supplier=Digi-Key, ComponentLink6URL=https://search.murata.co.jp/Ceramy/image/img/P02/partnumberingAT_LQ3E.pdf?src-supplier=Digi-Key, Core Material=Air, Current Rating=300mA, DC Current=300mA, Depth=0.55mm, Height=0.5mm, Height - Seated (Max)=0.022inch, Lead Free="Lead Free", Length=1.05mm, Max DC Current=300mA, Military Standard=Not, Mount="Surface Mount", Packaging="Tape and Reel", Pricing 1="1 = 0.10000, 10 = 0.06100, 100 = 0.04040, 500 = 0.03366, 1000 = 0.02827, 2500 = 0.02423 (USD)", Q Factor=8, Radiation Hardening=No, REACH SVHC="No SVHC", RoHS=Yes, Shielding=Unshielded, Stock 1=3502, Supplier 1=Digi-Key, Termination=SMD/SMT, Width=0.02inch
P1 P2: "Header, 4-Pin", LatestRevisionDate=17-Jul-2002, LatestRevisionNote="Re-released for DXP Platform.", Publisher="Altium Limited"
P3: "Header, 6-Pin", LatestRevisionDate=17-Jul-2002, LatestRevisionNote="Re-released for DXP Platform.", Publisher="Altium Limited"
P4: "Header, 2-Pin", LatestRevisionDate=17-Jul-2002, LatestRevisionNote="Re-released for DXP Platform.", Publisher="Altium Limited"
R1 R2 R3 R10 R12 R13 R14 R15 R16 R17 R18 R20 R21: "BOURNS - CR0603-J/-000ELF - RES, THICK FILM, 0R, 5%, 0.1W, 0603", Manufacturer=BOURNS, Manufacturer Part Number=CR0603-J/-000ELF, Power Rating=100, Resistance=0, Resistance Tolerance="± 5%", Resistor Case Style="0603 [1608 Metric]", Resistor Element Material="Thick Film", Resistor Mounting="Surface Mount Device<!--FANDB--><div class=\"features-and-benefits-container\"><div class=\"features-and-benefits-description\"><span class=\"features-benefits-value\">The Bourns CR series are standard thick film chip resistors. These resistors provide flexibility of performance, space saving and low cost. The Resistance range includes E96 and E24 decade values from 1ohm to 10Mohm.</span></div><div class=\"features-and-benefits-list\"><ul class=\"features-and-benefits-list-list\"><li class=\"features-and-benefits-list-item\">0201, 0402, 0603, 0805, 1206, 1210, 2010, 2512 standard case sizes available</li><li class=\"features-and-benefits-list-item\">±1% and ±5% tolerance</li><li class=\"features-and-benefits-list-item\">±100ppm/°C, ±200ppm/°C and ±250ppm/°C TCR values available</li><li class=\"features-and-benefits-list-item\">Power rating selectable for 50mW, 63mW, 0.1W, 0.125W, 0.25W, 0.5W and 1W based on ordering</li><li class=\"features-and-benefits-list-item\">Jumpers are available for all size</li><li class=\"features-and-benefits-list-item\">3 layer termination process with nickel barrier prevents leaching & provides excellent solderability</li><li class=\"features-and-benefits-list-item\">Suitable for all type of soldering processes</li><li class=\"features-and-benefits-list-item\">Tight dimensional tolerances</li><li class=\"features-and-benefits-list-item\">Maximum working voltage depends on case size</li><li class=\"features-and-benefits-list-item\">Operating temperature of -55°C to +125°C(CR0201) and -55°C to +155", Supplier Part Number 1=2008343, Temperature Coefficient=-, Voltage Rating=50, Automotive Qualification Standard=-, ComponentLink1Description=http://www.bourns.com/engineering/CHPREZTR/cr0603.stp, ComponentLink1URL=http://www.bourns.com/engineering/CHPREZTR/cr0603.stp, ComponentLink2Description=http://www.farnell.com/datasheets/2178762.pdf, ComponentLink2URL=http://www.farnell.com/datasheets/2178762.pdf, MSL="MSL 1 - Unlimited", Packaging="Cut Tape", Pricing 1="10=0.0146, 250=0.0097, 1000=0.0073, 5000=0.0049, 12500=0.0042 (GBP)", Product Range="CR Series", RoHS=YES, Stock 1=58200, Supplier 1=Farnell, SVHC="No SVHC (17-Dec-2015)"
R4 R5: "MULTICOMP - MCMR06X471 JTL - RES, CERAMIC, 470R, 5%, 0.1W, 0603", Manufacturer=MULTICOMP, Manufacturer Part Number="MCMR06X471 JTL", Supplier Part Number 1=2073513, ComponentLink1Description=http://www.farnell.com/datasheets/1716707.pdf, ComponentLink1URL=http://www.farnell.com/datasheets/1716707.pdf, Pricing 1="10=0.0089, 100=0.0076, 500=0.0063, 1000=0.0049, 2500=0.0033, 5000=0.0024, 25000=0.0016, 50000=0.0013 (GBP)", RoHS=Y-EX, Stock 1=3786, Supplier 1=Farnell
R6 R7: "MULTICOMP - MCMR06X4701FTL - RES, CERAMIC, 4K7, 1%, 0.1W, 0603", Manufacturer=MULTICOMP, Manufacturer Part Number=MCMR06X4701FTL, Power Rating=100, Resistance=4.7, Resistance Tolerance="± 1%", Resistor Case Style="0603 [1608 Metric]", Resistor Element Material=Ceramic, Supplier Part Number 1=2073509, Temperature Coefficient="± 100", Voltage Rating=75, Automotive Qualification Standard=-, ComponentLink1Description=http://www.farnell.com/datasheets/1716707.pdf, ComponentLink1URL=http://www.farnell.com/datasheets/1716707.pdf, Packaging="Cut Tape", Pricing 1="10=0.0085, 100=0.0051, 500=0.0036, 1000=0.0028, 2500=0.0023 (GBP)", Product Range="MCMR Series", RoHS=Y-EX, Stock 1=218618, Supplier 1=Farnell, SVHC="No SVHC (12-Jan-2017)<!--FANDB--><div class=\"features-and-benefits-container\"><div class=\"features-and-benefits-description\"><span class=\"features-benefits-value\">The Multicomp MCMR series resistors are automotive grade, anti sulphured thick film chip resistor. The resistance range includes E24 and E96 decade values from 1ohm to 10Mohm. These resistors are constructed on top of a high grade ceramic body.</span></div><div class=\"features-and-benefits-list\"><ul class=\"features-and-benefits-list-list\"><li class=\"features-and-benefits-list-item\">EIA 0402, 0603, 0805, 1206 chip sizes available</li><li class=\"features-and-benefits-list-item\">High reliability and stability</li><li class=\"features-and-benefits-list-item\">Automotive grade AEC-Q200 compliant</li><li class=\"features-and-benefits-list-item\">Complaint with (IEC 60068-1) 55/155/56 climatic category</li><li class=\"features-and-benefits-list-item\">Maximum operation voltage of 50V, 75V, 150V and 200V</li><li class=\"features-and-benefits-list-item\">Power rating of 62.5mW, 100mW, 125mW and 250mW</li><li class=\"features-and-benefits-list-item\">Available in ±1% and ±5% tolerance</li><li class=\"features-and-benefits-list-item\">Temperature coefficient (TCR) of +200ppm/°C, +100ppm/°C and -200ppm/°C to +400ppm/°C</li><li class=\"features-and-benefits-list-item\">Operating temperature range -55°C to 155"
R8 R11 R22: "MULTICOMP - MCMR06X103 JTL - RES, CERAMIC, 10K, 5%, 0.1W, 0603", Manufacturer=MULTICOMP, Manufacturer Part Number="MCMR06X103 JTL", Power Rating=100, Resistance=10, Resistance Tolerance="± 5%", Resistor Case Style="0603 [1608 Metric]", Resistor Element Material=Ceramic, Supplier Part Number 1=2073356, Temperature Coefficient="± 100", Voltage Rating=75, Automotive Qualification Standard="-<!--FANDB--><div class=\"features-and-benefits-container\"><div class=\"features-and-benefits-description\"><span class=\"features-benefits-value\">The Multicomp MCMR series resistors are automotive grade, anti sulphured thick film chip resistor. The resistance range includes E24 and E96 decade values from 1ohm to 10Mohm. These resistors are constructed on top of a high grade ceramic body.</span></div><div class=\"features-and-benefits-list\"><ul class=\"features-and-benefits-list-list\"><li class=\"features-and-benefits-list-item\">EIA 0402, 0603, 0805, 1206 chip sizes available</li><li class=\"features-and-benefits-list-item\">High reliability and stability</li><li class=\"features-and-benefits-list-item\">Automotive grade AEC-Q200 compliant</li><li class=\"features-and-benefits-list-item\">Complaint with (IEC 60068-1) 55/155/56 climatic category</li><li class=\"features-and-benefits-list-item\">Maximum operation voltage of 50V, 75V, 150V and 200V</li><li class=\"features-and-benefits-list-item\">Power rating of 62.5mW, 100mW, 125mW and 250mW</li><li class=\"features-and-benefits-list-item\">Available in ±1% and ±5% tolerance</li><li class=\"features-and-benefits-list-item\">Temperature coefficient (TCR) of +200ppm/°C, +100ppm/°C and -200ppm/°C to +400ppm/°C</li><li class=\"features-and-benefits-list-item\">Operating temperature range -55°C to 155", ComponentLink1Description=http://www.farnell.com/datasheets/1716707.pdf, ComponentLink1URL=http://www.farnell.com/datasheets/1716707.pdf, Packaging="Cut Tape", Pricing 1="10=0.0087, 100=0.0074, 500=0.0061, 1000=0.0048, 2500=0.0032, 5000=0.0024, 25000=0.0016, 50000=0.0013 (GBP)", Product Range="MCMR Series", RoHS=Y-EX, Stock 1=19791, Supplier 1=Farnell
R9: "MULTICOMP - MCWR06X2200FTL - RES, THICK FILM, 220R, 1%, 0.1W, 0603", Manufacturer=MULTICOMP, Manufacturer Part Number=MCWR06X2200FTL, Power Rating=100, Resistance=220, Resistance Tolerance="± 1%", Resistor Case Style="0603 [1608 Metric]", Resistor Element Material="Thick Film", Supplier Part Number 1=2447298, Temperature Coefficient="± 100", Voltage Rating=50, Automotive Qualification Standard=-, ComponentLink1Description=http://www.farnell.com/datasheets/1849611.pdf, ComponentLink1URL=http://www.farnell.com/datasheets/1849611.pdf, Packaging="Cut Tape", Pricing 1="10=0.0031, 100=0.0018, 500=0.0013, 1000=0.001, 2500=0.0008 (GBP)", Product Range="MCWR Series", RoHS=Y-EX, Stock 1=124834, Supplier 1=Farnell, SVHC="No SVHC (07-Jul-2017)<!--FANDB--><div class=\"features-and-benefits-container\"><div class=\"features-and-benefits-desc-container\"><span class=\"features-and-benefits-container-desc\">SMD Chip Resistor, Thick Film, 220 ohm, 50 V, 0603 [1608 Metric], 100 mW, ± 1"
R19: "MULTICOMP - MC0063W060311M - RES, THICK FILM, 1M, 1%, 0.063W, 0603", Manufacturer=MULTICOMP, Manufacturer Part Number=MC0063W060311M, Operating Temperature Max=155, Operating Temperature Min=-55, Operating Temperature Range="-55°C to +155", Power Rating=63, Resistance=1, Resistance Tolerance="± 1%", Resistor Case Style="0603 [1608 Metric]", Resistor Element Material="Thick Film", Resistor Mounting="Surface Mount Device", Supplier Part Number 1=9330410, Temperature Coeff. +=100, Temperature Coefficient="± 100", Tolerance +=1%, Voltage Rating=50, Voltage Rating V DC="50V<!--FANDB--><div class=\"features-and-benefits-container\"><div class=\"features-and-benefits-description\"><span class=\"features-benefits-value\">The Multicomp MC series current sense resistors are thick film chip resistors. The resistance range includes E96 and E24 decade values from 1ohm to 10Mohm.</span></div><div class=\"features-and-benefits-list\"><ul class=\"features-and-benefits-list-list\"><li class=\"features-and-benefits-list-item\">EIA 0402, 0603, 0805, 1206 chip sizes available</li><li class=\"features-and-benefits-list-item\">Small size and low weight</li><li class=\"features-and-benefits-list-item\">Suitable for both wave and reflow soldering</li><li class=\"features-and-benefits-list-item\">Reduction of assembly costs</li><li class=\"features-and-benefits-list-item\">Maximum working voltage of 50V(0402, 0603), 150V(0805), 200V(1206)</li><li class=\"features-and-benefits-list-item\">Available in ±1%, ±2% and ±5% tolerance</li><li class=\"features-and-benefits-list-item\">Power rating of 62.5mW, 100mW and 125mW</li><li class=\"features-and-benefits-list-item\">±400ppm/°C(1ohm to 10ohm), ±200ppm/°C(11ohm to 100ohm), ±100", Automotive Qualification Standard=-, ComponentLink1Description=http://www.farnell.com/datasheets/1788326.pdf, ComponentLink1URL=http://www.farnell.com/datasheets/1788326.pdf, ComponentLink2Description=http://www.farnell.com/cad/1558928.zip, ComponentLink2URL=http://www.farnell.com/cad/1558928.zip, External Depth=0.45, External Length / Height=1.6, External Width=0.8, No. of Pins=2, Packaging="Cut Tape", Pricing 1="10=0.0011, 100=0.001, 500=0.0009, 1000=0.0008, 2500=0.0007 (GBP)", Product Range="MC Series", Reel Quantity=5000, RoHS=Y-EX, Stock 1=333415, Supplier 1=Farnell, SVHC="No SVHC (17-Dec-2015)", Tape Width=8, Temperature Coeff. -=100, Tolerance -=1%
R23: library part 0R/0402, "RESISTOR, 0402, 0R, ANTI SULFURATION", Case/Package=0402, Case Code (Metric)=1005, Manufacturer=Multicomp, Manufacturer Part Number=MCMR04X000PTL, Power Rating=62.5mW, Resistance=0mR, Supplier Part Number 1=2072513, Temperature Coefficient=400ppm/°C, Voltage Rating=50V, Case Code (Imperial)=0402, ComponentLink1Description=https://datasheet.ciiva.com/7776/1716705-7776974.pdf, ComponentLink1URL=https://datasheet.ciiva.com/7776/1716705-7776974.pdf, ComponentLink2Description=https://datasheet.ciiva.com/28677/1716705-28677161.pdf, ComponentLink2URL=https://datasheet.ciiva.com/28677/1716705-28677161.pdf, Composition=Ceramic, Packaging="Cut Tape", Pricing 1="10=0.0057, 100=0.0034, 500=0.0024, 2500=0.0019, 5000=0.0015 (EUR)", REACH SVHC="No SVHC", Stock 1=0, Supplier 1=Farnell, Voltage Rating (DC)=50V
R24 R25: "MULTICOMP         MCWR06X27R0FTL            Surface Mount Chip Resistor, Thick Film, MCWR Series, 27 ohm, 100 mW,  1%, 50 V", Case/Package=0603, Case Code (Metric)=1608, Manufacturer=Multicomp, Manufacturer Part Number=MCWR06X27R0FTL, Power Rating=100mW, Supplier Part Number 1=2447316, Temperature Coefficient=100ppm/°C, Tolerance=1%, Voltage Rating=50V, Case Code (Imperial)=0603, ComponentLink1Description=https://datasheet.ciiva.com/46436/1849611-46436376.pdf, ComponentLink1URL=https://datasheet.ciiva.com/46436/1849611-46436376.pdf, Composition="Thick Film", Mount="Surface Mount", Packaging="Cut Tape", REACH SVHC=Unknown, Resistance=27R, Stock 1=0, Supplier 1=Farnell, Voltage Rating (DC)=50V
S1: "SWITCH TACTILE SPST-NO 0.05A 32V", Case/Package=SMD/SMT, Current Rating=50mA, Manufacturer="ITT C&K", Max Operating Temperature=85°C, Max Voltage Rating (DC)=32V, Min Operating Temperature=-40°C, Operating Force=2N, Package Quantity=1, Power Rating=1W, Supplier Part Number 1=2845727, Actuator Length=0.5mm, Actuator Type=Standard, ComponentLink1Description=https://www.ckswitches.com/media/1479/kmr2.pdf?src-supplier=Digi-Key, ComponentLink1URL=https://www.ckswitches.com/media/1479/kmr2.pdf?src-supplier=Digi-Key, ComponentLink2Description=http://www.ck-components.com/14414/kmr2_9aug12.pdf/?src-supplier=Avnet+Europe, ComponentLink2URL=http://www.ck-components.com/14414/kmr2_9aug12.pdf/?src-supplier=Avnet+Europe, ComponentLink3Description=http://www1.futureelectronics.com/doc/C%20-%20K%20COMPONENTS/KMR221NGLFS.pdf?src-supplier=Future+Electronics, ComponentLink3URL=http://www1.futureelectronics.com/doc/C%20-%20K%20COMPONENTS/KMR221NGLFS.pdf?src-supplier=Future+Electronics, Contact Material=Silver, Contact Plating=Silver, Depth=4.6mm, Illumination Type=Non-Illuminated, Lead Free="Lead Free", Length=2.8mm, Manufacturer Part Number=KMR221NGLFS, Max Current Rating=50mA, Mechanical Life=200000Cycles, Mount="Surface Mount", Orientation=Straight, Packaging="Tape and Reel", Pricing 1="10 = 0.29100, 500 = 0.27600, 1000 = 0.21800, 5000 = 0.18500, 10000 = 0.18100 (GBP)", Radiation Hardening=No, RoHS=Yes, Stock 1=3038, Supplier 1=Farnell, Switch Function=Off-Mom, Switch Travel=0.25mm, Termination="Gull Wing", Throw Configuration=SPST, Voltage Rating (DC)=32V
U1: library part STM32L072CZT6, "IC MCU 32BIT 192KB FLASH 48LQFP", Manufacturer=STMicroelectronics, Supplier Part Number 1=511-STM32L072CZT6, Manufacturer Part Number=STM32L072CZT6, Pricing 1="1 = 4.14000, 10 = 3.52000, 50 = 3.52000, 100 = 3.05000, 1000 = 2.19000, 10000 = 2.08000 (USD)", Stock 1=1435, Supplier 1=Mouser